# EAGLE board InverterDual (EAGLE 7.5.0)
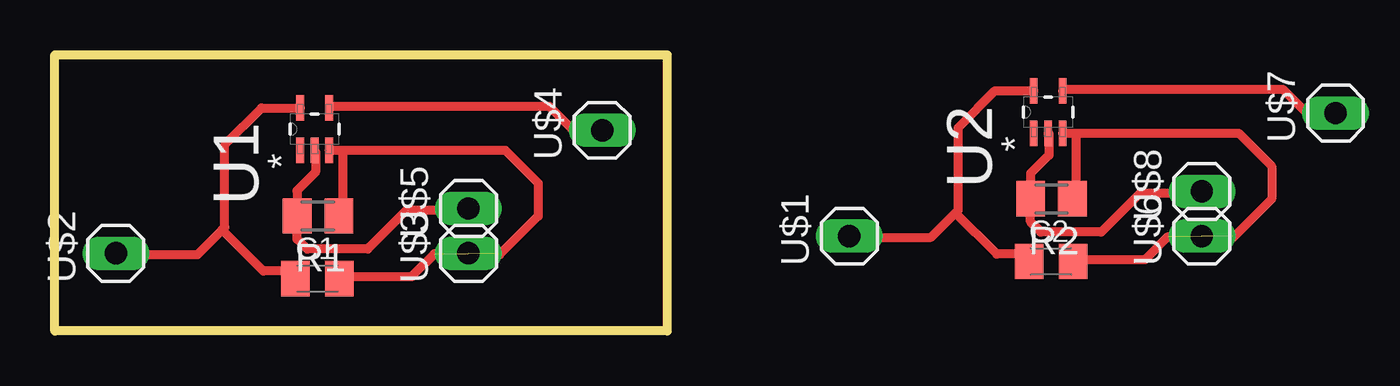
[diagram p0: board, top side]

Size 27.83 x 12.56 mm. Coordinates in mm from the lower left corner, seen from the top.
Outline: 0,0 0,12.56 27.83,12.56 27.83,0 0,0
Copper layers (1*16): Top 0.035mm / dielectric 1.5mm / Bottom 0.035mm
Design rules "default": minimum track width 10mil, minimum drill 24mil, track to track 8mil, track to pad 8mil, pad to pad 8mil, via to via 8mil, smd to smd 8mil, copper to edge 40mil, drill to drill 8mil, minimum pad ring 10mil, minimum via ring 8mil, stop-mask expansion 4mil, vias tented up to drill 0mil, thermal gap 10mil

## Footprints (pad centres in the part's own frame; a part is rotated, then mirrored left to right if it is on the bottom)
C0805K = smd 1.3 x 1.6: 1 -1,0; 2 1,0
M0805 = smd 1.3 x 1.6: 1 -0.95,0; 2 0.95,0
SOT65P210X110-5N = smd 1.168 x 0.356: 1 -0.965,0.66; 2 -0.965,0; 3 -0.965,-0.66; 4 0.965,-0.66; 5 0.965,0.66
1X1 = drill 1.016 long: 1 0,0

## Placement (x,y rotation side)
C1  10nF  [C0805K]  11.94,2.38 0 top
C2  10nF  [C0805K]  45.29,3.16 0 top  (outside the outline)
R1  10K  [M0805]  11.96,5.23 180 top
R2  10K  [M0805]  45.31,6.01 180 top  (outside the outline)
U1  74HC1GU04GW  [SOT65P210X110-5N]  11.81,9.18 90 top
U2  74HC1GU04GW  [SOT65P210X110-5N]  45.16,9.96 90 top  (outside the outline)
U$1  PINHD1  [1X1]  36.12,4.31 90 top  (outside the outline)
U$2  PINHD1  [1X1]  2.77,3.53 90 top
U$3  PINHD1  [1X1]  18.8,3.53 90 top
U$4  PINHD1  [1X1]  24.88,9.13 90 top
U$5  PINHD1  [1X1]  18.8,5.57 90 top
U$6  PINHD1  [1X1]  52.15,4.31 90 top  (outside the outline)
U$7  PINHD1  [1X1]  58.23,9.91 90 top  (outside the outline)
U$8  PINHD1  [1X1]  52.15,6.35 90 top  (outside the outline)

## Library data of the parts
C1 C2 R1 R2 = rcl
U1 U2 = NXP_By_element14_Batch_1; MPN: 74HC1GU04GW; OC_FARNELL: 1085252; OC_NEWARK: 99K0570; PACKAGE: SOT-5; SUPPLIER: NXP
U$1-U$8 = KevinsLib

## Nets
!OE: U1.4 U$4.1
!OE1: U2.4 U$7.1
+3V1: C2.1 U2.5 U$1.1
+3V3: C1.1 U1.5 U$2.1
GND: C1.2 R1.1 U1.3 U$3.1
GND1: C2.2 R2.1 U2.3 U$6.1
GPIO1: R2.2 U2.2 U$8.1
GPIO15: R1.2 U1.2 U$5.1

## Tracks (layer width: path | path; a pad name or v marks a point on that pad's centre or on a via)
!OE
  Top 0.406: U1.4 12.54,10.22 22.47,10.22 23.56,9.13 U$4.1
!OE1
  Top 0.406: U2.4 45.9,11 55.82,11 56.91,9.91 U$7.1
+3V1
  Top 0.406: 40.95,5.38 39.83,4.26 36.17,4.26 U$1.1 | 40.95,5.38 41.07,5.5 41.07,9.25 42.74,10.93 U2.5 | C2.1 43.95,3.5 42.82,3.5 40.95,5.38
+3V3
  Top 0.406: 7.59,4.59 6.48,3.48 2.82,3.48 U$2.1 | 7.59,4.59 7.72,4.72 7.72,8.47 9.39,10.14 U1.5 | C1.1 10.6,2.72 9.47,2.72 7.59,4.59
GND  (2 unrouted)
  Top 0.406: C1.2 13.03,2.47 16.22,2.47 17.26,3.51 | U1.3 13.1,8.22 | 13.1,8.22 20.47,8.22 21.97,6.72 21.97,5.22 20.22,3.47 20.18,3.51 | R1.1 13.1,5.42 13.1,8.22
GND1  (2 unrouted)
  Top 0.406: C2.2 46.38,3.25 49.57,3.25 50.61,4.29 | U2.3 46.45,9 | 46.45,9 53.82,9 55.32,7.5 55.32,6 53.57,4.25 53.53,4.29 | R2.1 46.45,6.2 46.45,9
GPIO1
  Top 0.406: U$8.1 52.05,6.25 49.32,6.25 47.57,4.5 44.82,4.5 44.36,4.96 R2.2 44.36,7.17 45.2,8 45.2,8.96 U2.2
GPIO15
  Top 0.406: U$5.1 18.7,5.47 15.97,5.47 14.22,3.72 11.47,3.72 11.01,4.18 R1.2 11.01,6.38 11.85,7.22 11.85,8.18 U1.2